# Altium PCB 16CH_PWM_POWER_00.PcbDoc
Units mm, origin at the board's own origin, x right, y up, seen from the top; angles counter-clockwise.
Board outline 100 x 60 mm, 2 copper layers (Top Layer, Bottom Layer), stack 0.971 mm thick; 79 components, 61 nets, 212 pads, 370 vias.
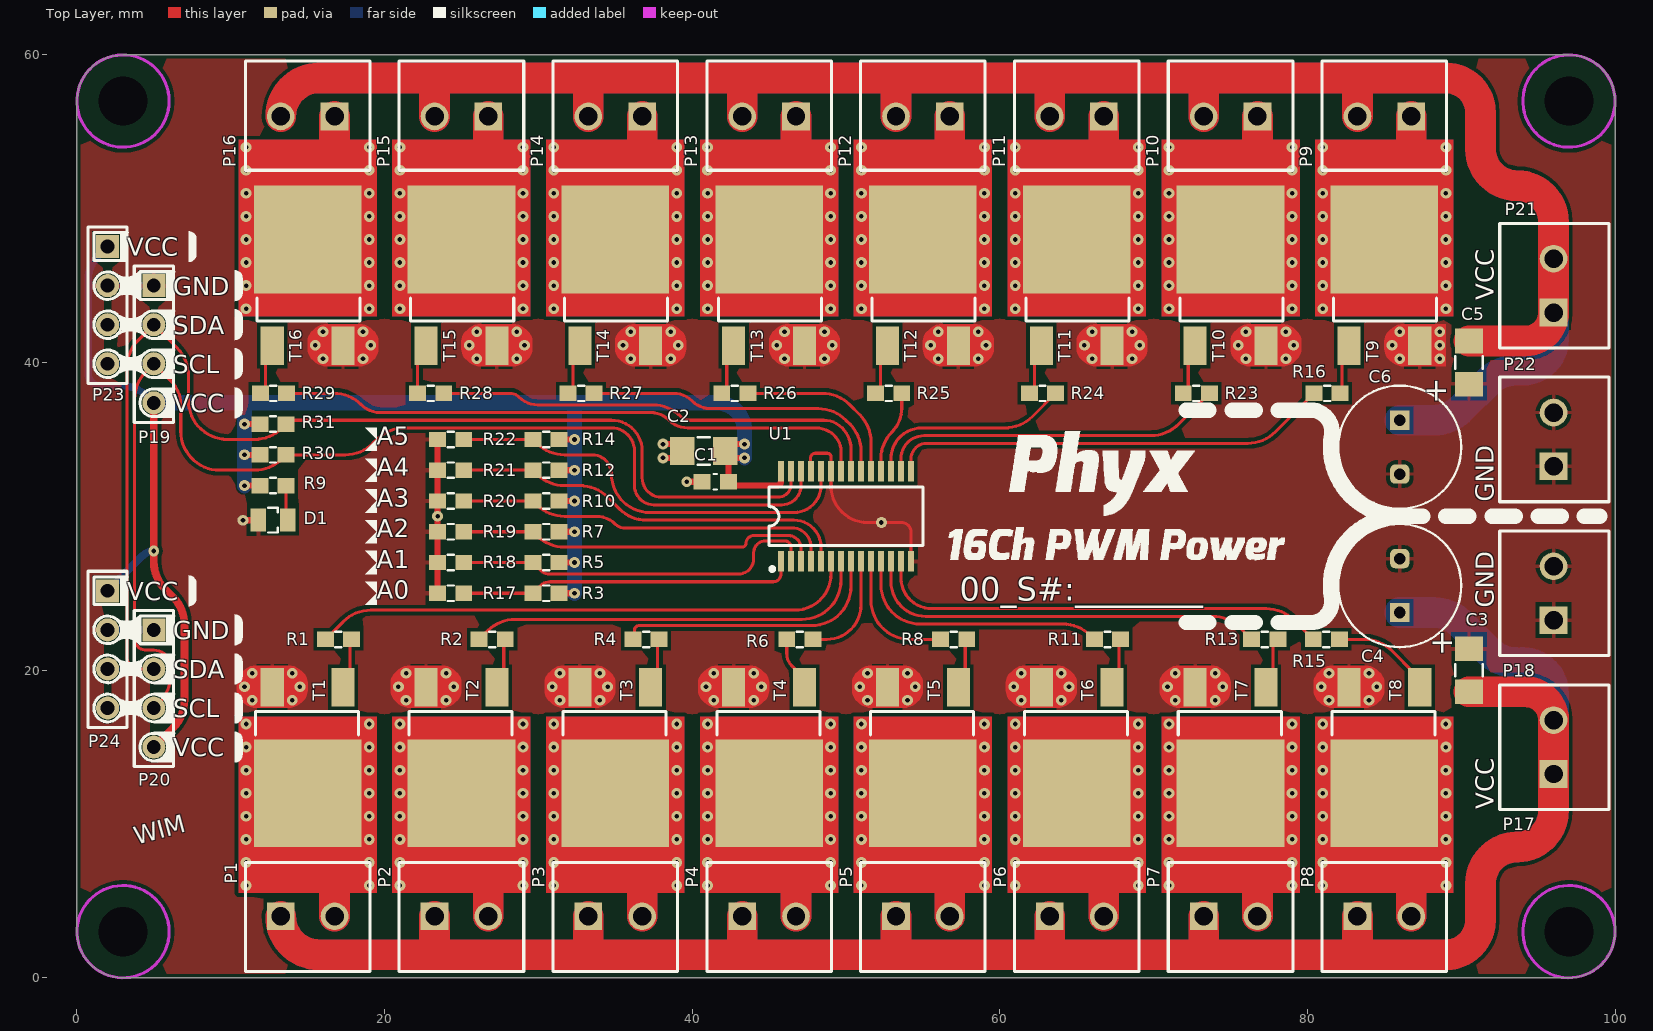
[diagram p0: Top Layer view]
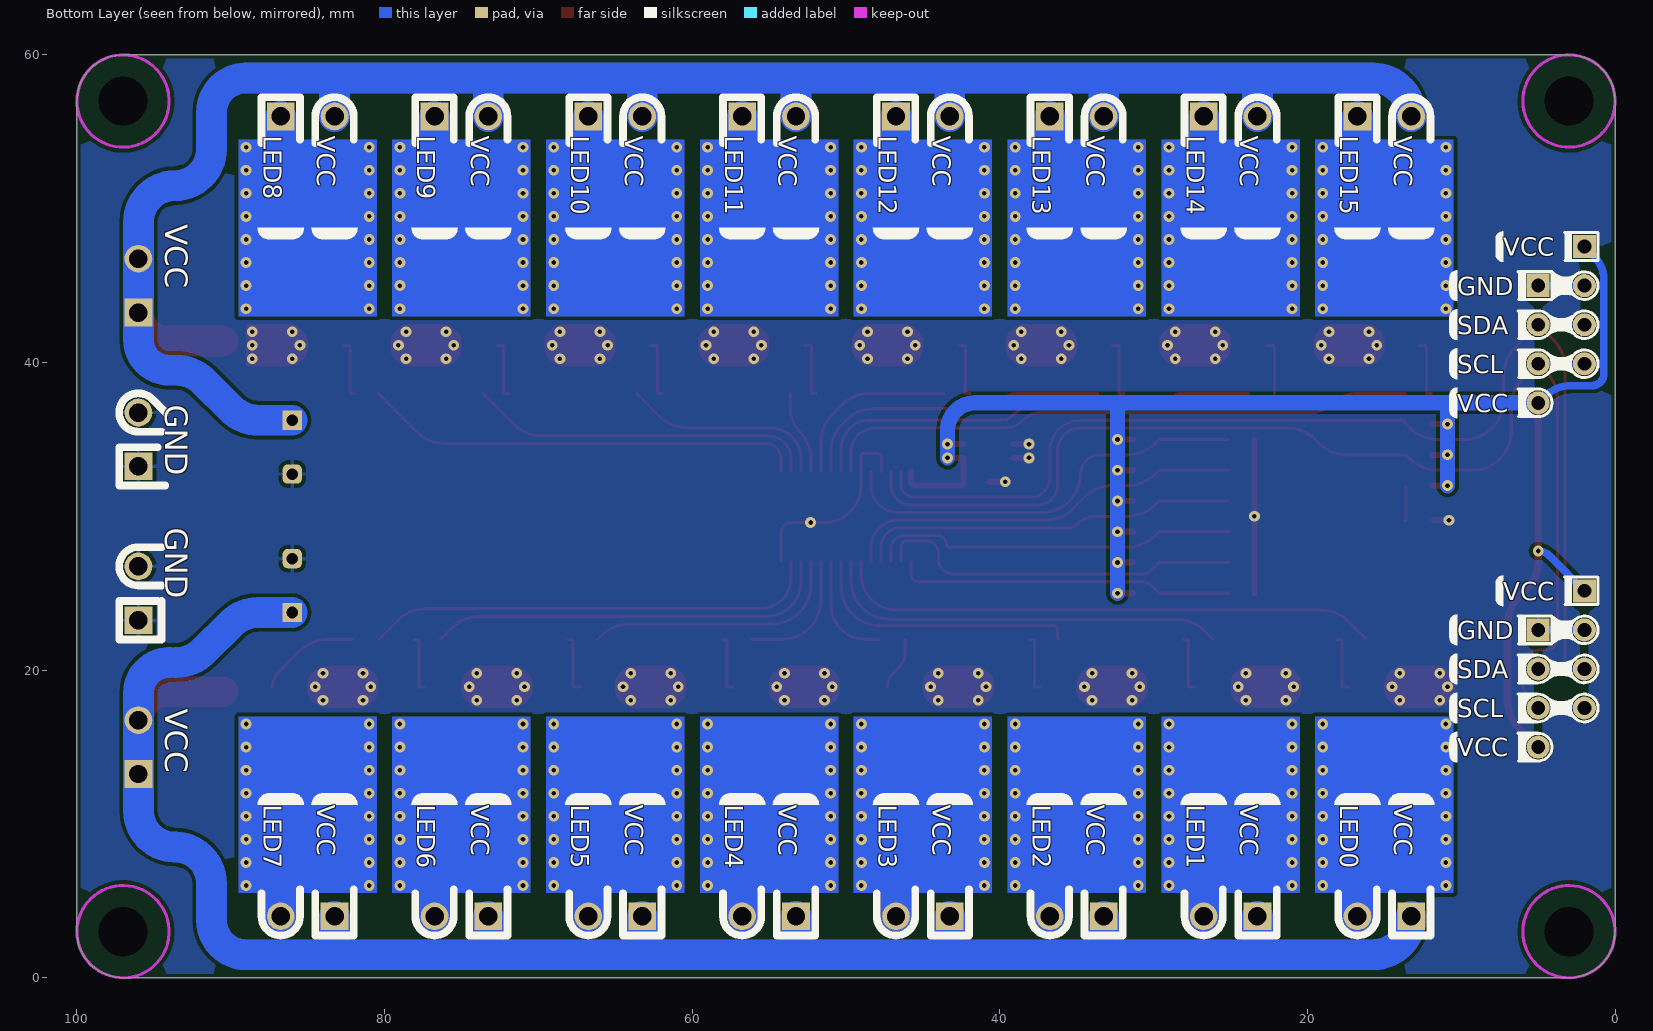
[diagram p1: Bottom Layer view, seen from below]
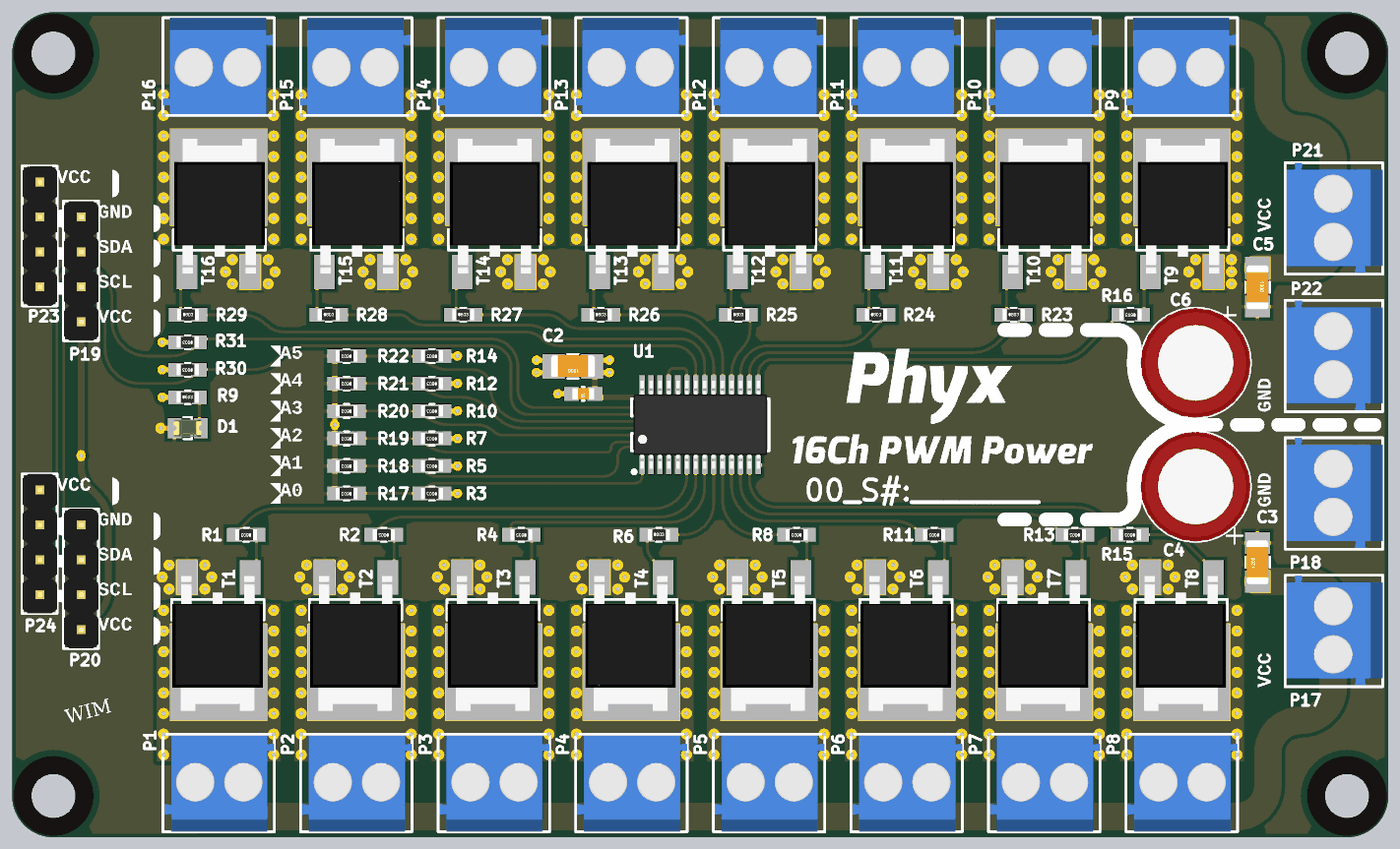
[diagram p2: 3D render of the assembled board from above, using the file's embedded part models]

## Layer stack, top to bottom
Top Solder: solder mask 0.0102, Solder Resist, Dk 3.5
Top Layer: signal copper 0.0356
Dielectric1: dielectric 0.9, FR-4, Dk 4.8
Bottom Layer: signal copper 0.0356
Bottom Solder: solder mask 0.0102, Solder Resist, Dk 3.5

## Board outline
0,3 0,57 cw(c3,57) 3,60 97,60 cw(c97,57) 100,57 100,3 cw(c97,3) 97,0 3,0 cw(c3,3)

## Design rules (kind name [scope] priority, off if disabled: settings)
BoardOutlineClearance [All] p1: gap=0.25 ignorepadtopadclearanceinfootprint=FALSE
Clearance [All] p1: gap=0.15 ignorepadtopadclearanceinfootprint=FALSE except(0: Arc-Hole Track-Hole SMDPad-Hole THPad-Hole Via-Hole Fill-Hole Poly-Hole Region-Hole Text-Hole; 0.25: Arc-Poly Track-Poly SMDPad-Poly THPad-Poly Via-Poly Fill-Poly Poly-Poly)
HoleSize [All] p1: absolutevalues=TRUE maxlimit=4 minlimit=0.025 maxpercent=80.000 minpercent=20.000
MinimumSolderMaskSliver [All] p1: minsoldermaskwidth=0.1
PolygonConnect PolygonConnect_Via [IsVia] p1: connectstyle=Direct reliefconductorwidth=0.254 reliefentries=4 polygonreliefangle="90 Angle" airgapwidth=0.254
PolygonConnect PolygonConnect_TIO [All vs OnLayer('Top Layer')] p2: connectstyle=Relief reliefconductorwidth=0.25 reliefentries=4 polygonreliefangle="90 Angle" airgapwidth=0.25
PolygonConnect [All] p3: connectstyle=Relief reliefconductorwidth=0.25 reliefentries=4 polygonreliefangle="90 Angle" airgapwidth=0.25
RoutingVias [All] p1: holewidth=0.3 width=0.7 viastyle="Through Hole" minholewidth=0.3 minwidth=0.7 maxholewidth=0.3 maxwidth=0.7
SilkToSolderMaskClearance SilkscreenOverComponentPads [IsPad] p1: minsilkscreentomaskgap=0.254 clearancetoexposedcopper=TRUE
SolderMaskExpansion SolderMaskExpansion_VIA [IsVia] p1: expansion=-0.1 useseparateexpansions=TRUE expansionbottom=-10
SolderMaskExpansion [All] p2: expansion=0.05
Width [All] p1: maxlimit=2 minlimit=0.15 preferedwidth=0.5 minimp=50.000000 maximp=50.000000 favimp=50.000000
27 further rules are at their usual default settings.

## Classes and differential pairs
net class POWER: GND VCC VPWR1 VPWR2

## Components (designator, comment, footprint, x,y, rotation, side; value= is the part's Value field where it differs from the comment)
C1 "CAP_CERAMIC" C0603_N 41.5,32.25 r180 top value="100nF 16V"
C2 "CAP_CERAMIC" C1206_N 40.75,34.25 r180 top value="10uF 25V"
C3 "CAP_CERAMIC" C1206_N 90.5,20 r90 top value="10uF 25V"
C4 "CAP_POL" C_8x11.5_3.5mm 86,25.5 r90 top value="100uF 25V"
C5 "CAP_CERAMIC" C1206_N 90.5,40 r270 top value="10uF 25V"
C6 "CAP_POL" C_8x11.5_3.5mm 86,34.5 r270 top value="100uF 25V"
D1 "Green LED" LED_0805_GR 12.75,29.75 r180 top
P1 "2 Way Screw HDR 3,5mm" WE_691103110002 15,4 r0 top value=691103110002
P2 "2 Way Screw HDR 3,5mm" WE_691103110002 25,4 r0 top value=691103110002
P3 "2 Way Screw HDR 3,5mm" WE_691103110002 35,4 r0 top value=691103110002
P4 "2 Way Screw HDR 3,5mm" WE_691103110002 45,4 r0 top value=691103110002
P5 "2 Way Screw HDR 3,5mm" WE_691103110002 55,4 r0 top value=691103110002
P6 "2 Way Screw HDR 3,5mm" WE_691103110002 65,4 r0 top value=691103110002
P7 "2 Way Screw HDR 3,5mm" WE_691103110002 75,4 r0 top value=691103110002
P8 "2 Way Screw HDR 3,5mm" WE_691103110002 85,4 r0 top value=691103110002
P9 "2 Way Screw HDR 3,5mm" WE_691103110002 85,56 r180 top value=691103110002
P10 "2 Way Screw HDR 3,5mm" WE_691103110002 75,56 r180 top value=691103110002
P11 "2 Way Screw HDR 3,5mm" WE_691103110002 65,56 r180 top value=691103110002
P12 "2 Way Screw HDR 3,5mm" WE_691103110002 55,56 r180 top value=691103110002
P13 "2 Way Screw HDR 3,5mm" WE_691103110002 45,56 r180 top value=691103110002
P14 "2 Way Screw HDR 3,5mm" WE_691103110002 35,56 r180 top value=691103110002
P15 "2 Way Screw HDR 3,5mm" WE_691103110002 25,56 r180 top value=691103110002
P16 "2 Way Screw HDR 3,5mm" WE_691103110002 15,56 r180 top value=691103110002
P17 "2 Way Screw HDR 3,5mm" WE_691103110002 96,15 r90 top value=691103110002
P18 "2 Way Screw HDR 3,5mm" WE_691103110002 96,25 r90 top value=691103110002
P19 "Header 4" HDR1X4 5,45 r270 top
P20 "Header 4" HDR1X4 5,22.62 r270 top
P21 "2 Way Screw HDR 3,5mm" WE_691103110002 96,45 r90 top value=691103110002
P22 "2 Way Screw HDR 3,5mm" WE_691103110002 96,35 r90 top value=691103110002
P23 "Header 4" HDR1X4 2,47.54 r270 top
P24 "Header 4" HDR1X4 2,25.16 r270 top
R1 "RESISTOR" R0603_N 17,22 r180 top value=1K
R2 "RESISTOR" R0603_N 27,22 r180 top value=1K
R3 "RESISTOR" R0603_N 30.5,25 r180 top value=0R
R4 "RESISTOR" R0603_N 37,22 r180 top value=1K
R5 "RESISTOR" R0603_N 30.5,27 r180 top value=0R
R6 "RESISTOR" R0603_N 47,22 r0 top value=1K
R7 "RESISTOR" R0603_N 30.5,29 r180 top value=0R
R8 "RESISTOR" R0603_N 57,22 r180 top value=1K
R9 "RESISTOR" R0603_N 12.75,32 r0 top value=330R
R10 "RESISTOR" R0603_N 30.5,31 r180 top value=0R
R11 "RESISTOR" R0603_N 67,22 r180 top value=1K
R12 "RESISTOR" R0603_N 30.5,33 r180 top value=0R
R13 "RESISTOR" R0603_N 77.225,22 r180 top value=1K
R14 "RESISTOR" R0603_N 30.5,35 r180 top value=0R
R15 "RESISTOR" R0603_N 81.225,22 r180 top value=1K
R16 "RESISTOR" R0603_N 81.275,38 r180 top value=1K
R17 "RESISTOR" R0603_N 24.3,25 r180 top value=10K
R18 "RESISTOR" R0603_N 24.3,27 r180 top value=10K
R19 "RESISTOR" R0603_N 24.3,29 r180 top value=10K
R20 "RESISTOR" R0603_N 24.3,31 r180 top value=10K
R21 "RESISTOR" R0603_N 24.3,33 r180 top value=10K
R22 "RESISTOR" R0603_N 24.3,35 r180 top value=10K
R23 "RESISTOR" R0603_N 72.775,38 r0 top value=1K
R24 "RESISTOR" R0603_N 62.775,38 r0 top value=1K
R25 "RESISTOR" R0603_N 52.775,38 r0 top value=1K
R26 "RESISTOR" R0603_N 42.775,38 r0 top value=1K
R27 "RESISTOR" R0603_N 32.775,38 r0 top value=1K
R28 "RESISTOR" R0603_N 23,38 r0 top value=1K
R29 "RESISTOR" R0603_N 12.775,38 r0 top value=1K
R30 "RESISTOR" R0603_N 12.75,34 r180 top value=1K
R31 "RESISTOR" R0603_N 12.75,36 r180 top value=1K
T1 "70A 30V N-Ch MOSFET Vgs 2.5" TO-252 15,12 r180 top value=AOD210
T2 "70A 30V N-Ch MOSFET Vgs 2.5" TO-252 25,12 r180 top value=AOD210
T3 "70A 30V N-Ch MOSFET Vgs 2.5" TO-252 35,12 r180 top value=AOD210
T4 "70A 30V N-Ch MOSFET Vgs 2.5" TO-252 45,12 r180 top value=AOD210
T5 "70A 30V N-Ch MOSFET Vgs 2.5" TO-252 55,12 r180 top value=AOD210
T6 "70A 30V N-Ch MOSFET Vgs 2.5" TO-252 65,12 r180 top value=AOD210
T7 "70A 30V N-Ch MOSFET Vgs 2.5" TO-252 75,12 r180 top value=AOD210
T8 "70A 30V N-Ch MOSFET Vgs 2.5" TO-252 85,12 r180 top value=AOD210
T9 "70A 30V N-Ch MOSFET Vgs 2.5" TO-252 85,48 r0 top value=AOD210
T10 "70A 30V N-Ch MOSFET Vgs 2.5" TO-252 75,48 r0 top value=AOD210
T11 "70A 30V N-Ch MOSFET Vgs 2.5" TO-252 65,48 r0 top value=AOD210
T12 "70A 30V N-Ch MOSFET Vgs 2.5" TO-252 55,48 r0 top value=AOD210
T13 "70A 30V N-Ch MOSFET Vgs 2.5" TO-252 45,48 r0 top value=AOD210
T14 "70A 30V N-Ch MOSFET Vgs 2.5" TO-252 35,48 r0 top value=AOD210
T15 "70A 30V N-Ch MOSFET Vgs 2.5" TO-252 25,48 r0 top value=AOD210
T16 "70A 30V N-Ch MOSFET Vgs 2.5" TO-252 15,48 r0 top value=AOD210
U1 "I2C 12-bit 16Ch PWM" NXP_SOT361-1 50,30 r0 top value=PCA9685PW

## Footprints (in the part's own frame and the unit in brackets; to place one, negate y for a bottom-side part, rotate by r counter-clockwise, add the part's x,y. Pads: shape width x height; smd on the part's side, far side on the other; paste and mask are expansions set on the pad)
C0603_N [mm] "Low density"
  rect 1.1x1 smd: 1(-0.85,0) 2(0.85,0)
  silkscreen extent -0.1,-0.5 0.1,0.5, body extent -0.8,-0.4 0.8,0.4, height 0.3
C1206_N [mm] "low density"
  rect 1.6x1.8 smd: 1(-1.4,0) 2(1.4,0)
  silkscreen extent -0.4,-0.89 0.4,0.89, body extent -1.6,-0.8 1.6,0.8, height 1
C_8x11.5_3.5mm [mm] "Capacitor, Electrolytic, Radial; Body 8 x 11.5mm; 3.5mm pitch"
  rect 1.25x1.25 hole 0.75: 1(-1.75,0)
  rrect50% 1.25x1.25 hole 0.75: 2(1.75,0)
  silkscreen extent -4,-4 4,4, body extent -4,-4 4,4, height 12
HDR1X4 [mm] "Connector; Header; 4 Position"
  rect 1.5x1.5 hole 0.9: 1(0,0)
  round 1.5 hole 0.9: 2(2.54,0) 3(5.08,0) 4(7.62,0)
  silkscreen extent -1.27,-1.27 8.89,1.27, body extent -1.27,-1.23 8.89,1.27, height 8.2
LED_0805_GR [mm] "0805 LED GREEN"
  rect 1x1.5 smd: 1(-0.95,0) 2(0.95,0)
  silkscreen extent -0.3,-0.8 0.3,0.8, body extent -1.01,-0.62 1.01,0.63, height 1.1
NXP_SOT361-1 [mm] "TSSOP; 28 Leads; Body Width 4.1 mm; Pitch 0.65 mm"
  rect 0.4x1.35 smd: 1(-4.225,-2.925) 2(-3.575,-2.925) 3(-2.925,-2.925) 4(-2.275,-2.925) 5(-1.625,-2.925) 6(-0.975,-2.925) 7(-0.325,-2.925) 8(0.325,-2.925) 9(0.975,-2.925) 10(1.625,-2.925) 11(2.275,-2.925) 12(2.925,-2.925) 13(3.575,-2.925) 14(4.225,-2.925) 15(4.225,2.925) 16(3.575,2.925) 17(2.925,2.925) 18(2.275,2.925) 19(1.625,2.925) 20(0.975,2.925) 21(0.325,2.925) 22(-0.325,2.925) 23(-0.975,2.925) 24(-1.625,2.925) 25(-2.275,2.925) 26(-2.925,2.925) 27(-3.575,2.925) 28(-4.225,2.925)
  silkscreen extent -5,-3.55 5,1.9, body extent -4.85,-3.2 4.85,3.2, height 1.2
R0603_N [mm] "Low density"
  rect 1.1x1 smd: 1(-0.85,0) 2(0.85,0)
  silkscreen extent -0.2,-0.5 0.2,0.5, body extent -0.8,-0.41 0.8,0.41, height 0.45
TO-252 [mm] "TO-252"
  rect 1.5x2.5 smd: 1(-2.3,-6.9) 2(2.3,-6.9)
  rect 7x7 smd: 3(0,0)
  silkscreen extent -3.3,-5.3 3.4,-3.8, body extent -3.21,-7 3.37,2.81, height 2.3
WE_691103110002 [mm]
  rect 1.8x1.8 hole 1.2: 1(-1.75,0)
  round 1.8 hole 1.2: 2(1.75,0)
  silkscreen extent -4.05,-3.6 4.05,3.5, body extent -3.95,-3.6 4.05,3.4, height 8.41

## Part data
C1: library part "CAP # 100nF 16V 0603", "Capacitor Ceramic"
C2 C3 C5: library part "CAP # 10uF 25V 1206", "Capacitor Ceramic", Supplier Part Number 1=2320887, Supplier 1=Farnell
C4 C6: library part "CAP 100uF 25V 8x11mm", "Capacitor electrolyt", Supplier Part Number 1=1902007, Supplier 1=Farnell
D1: library part "LED # Green 0805", "=Description", Supplier Part Number 1=2099239, Supplier 1=Farnell
P1 P2 P3 P4 P5 P6 P7 P8 P9 P10 P11 P12 P13 P14 P15 P16 P17 P18 P21 P22: library part "Terminal Block 3,5mm 2way - 691103110002", Supplier 1=Wurth
P19 P20 P23 P24: library part "Pin Header 2.54mm 4way"
R1 R2 R4 R6 R8 R11 R13 R15 R16 R23 R24 R25 R26 R27 R28 R29 R30 R31: library part "RES # 1K 0603"
R3 R5 R7 R10 R12 R14: library part "RES # 0R 0603", Supplier Part Number 1=2447743, Supplier 1=Farnell
R9: library part "RES # 330R 0603"
R17 R18 R19 R20 R21 R22: library part "RES # 10K 0603", Supplier Part Number 1=2502397, Supplier 1=Farnell
T1 T2 T3 T4 T5 T6 T7 T8 T9 T10 T11 T12 T13 T14 T15 T16: library part "AOD210 N-Ch MOSFET 70A", Supplier 1=AliExpress
U1: library part "PWM # PCA9685PW", "=Description", Supplier Part Number 1=1854074, Supplier 1=Farnell

## Free pads (board coordinates)
  round 2.6 hole 3.2 unplated mask+1.6: 0(3,3) 0(3,57) 0(97,3) 0(97,57)

## Via types
v1: diameter 0.7, hole 0.3, Top Layer to Bottom Layer, 370 vias

## Nets (pads, with @x,y where several pads share a name; then routed paths per layer and width w, separated by ;. In a path a pad name is that pad's centre, name@x,y a point inside that pad or via, vN(x,y) a via of type N, cw(c..) or ccw(c..) an arc to the next point about the centre after c; other vN are vias at no path point)
A0: R3.2 R17.1 U1.1 | length 22
  Top Layer w0.2: R17.1 R3.2 30.153,25.503 cw(c30.75,24.905) 30.75,25.75 45.275,25.75 ccw(c45.275,26.25) 45.493,25.8 ccw(c45.275,26.25) 45.775,26.25 U1.1
A1: R5.2 R18.1 U1.2 | length 24.1
  Top Layer w0.2: R18.1 R5.2 30.19,26.46 ccw(c30.696,26.966) 30.696,26.25 32.003,26.25 43,26.25 ccw(c43,27.25) 44,27.25 44,27.65 cw(c44.75,27.65) 44.75,28.4 46.025,28.4 cw(c46.025,28) 46.425,28 U1.2
A2: R7.2 R19.1 U1.3 | length 24
  Top Layer w0.2: R19.1 R7.2 29.906,28.744 ccw(c31.702,30.54) 31.702,28 43.25,28 ccw(c43.25,28.25) 43.5,28.25 cw(c44,28.25) 44,28.75 46.25,28.75 cw(c46.25,27.925) 47.075,27.925 U1.3
A3: R10.2 R20.1 U1.4 | length 24.7
  Top Layer w0.2: R20.1 R10.2 29.906,30.744 ccw(c31.702,32.54) 31.702,30 33.793,30 cw(c33.793,28.293) 35,29.5 ccw(c35.604,30.104) 35.5,29.256 ccw(c35.604,30.104) 35.604,29.25 46.475,29.25 cw(c46.475,28) 47.725,28 U1.4
A4: R12.2 R21.1 U1.5 | length 26.2
  Top Layer w0.2: R21.1 R12.2 29.906,32.744 ccw(c31.702,34.54) 31.702,32 32.698,32 cw(c32.698,29.46) 34.494,31.256 35.256,30.494 ccw(c37.052,32.29) 36.5,29.811 ccw(c37.052,32.29) 37.052,29.75 46.625,29.75 cw(c46.625,28) 48.375,28 U1.5
A5: R14.2 R22.1 U1.24 | length 27.6
  Top Layer w0.2: R22.1 R14.2 29.906,34.744 ccw(c31.702,36.54) 31.702,34 33.5,34 cw(c33.5,32.75) 34.75,32.75 ccw(c37.25,32.75) 35.25,31.25 ccw(c37.25,32.75) 35.75,30.75 ccw(c37.25,32.75) 37.25,30.25 46.625,30.25 ccw(c46.625,32) 48.375,32 U1.24
GND: C1.2 C2.2 C3.2 C4.2 C5.2 C6.2 D1.2 P18.1 P18.2 P19.1 P20.1 P22.1 P22.2 P23.2 P24.2 R17.2 R18.2 R19.2 R20.2 R21.2 R22.2 T1.2 T2.2 T3.2 T4.2 T5.2 T6.2 T7.2 T8.2 T9.2 T10.2 T11.2 T12.2 T13.2 T14.2 T15.2 T16.2 U1.14 U1.23 U1.25 | length 33.5
  Top Layer w0.2: U1.25 cw(c47.725,32.95) 47.7,32.95 47.7,33.8 cw(c48,33.8) 48,34.1 48.8,34.1 cw(c48.8,33.875) 49.025,33.875 U1.23 49.025,31.975 ccw(c51.4,31.975) 51.4,29.6 53.6,29.6 cw(c53.6,28.975) 54.225,28.975 U1.14
  Top Layer w0.4: v1(10.8,29.75) D1.2 ; R17.2 R18.2 R19.2 R20.2 R21.2 R22.2 ; v1(38.1,33.8) C2.2@39.1,33.8 ; v1(38.1,34.7) C2.2@39.1,34.7 ; v1(39.65,32.25) C1.2
  Bottom Layer w0.5: P24.2 4.96,22.62 cw(c4.96,22.21) P20.1@5.25,22.5 ; P23.2 P19.1
  other v1: 11.4,18.05 14,18.05 21.4,18.05 24,18.05 31.4,18.05 34,18.05 41.4,18.05 44,18.05 51.4,18.05 54,18.05 61.4,18.05 64,18.05 71.4,18.05 74,18.05 81.4,18.05 84,18.05 10.9,18.925 14.5,18.925 20.9,18.925 24.5,18.925 30.9,18.925 34.5,18.925 40.9,18.925 44.5,18.925 50.9,18.925 54.5,18.925 60.9,18.925 64.5,18.925 70.9,18.925 74.5,18.925 80.9,18.925 84.5,18.925 11.4,19.8 14,19.8 21.4,19.8 24,19.8 31.4,19.8 34,19.8 41.4,19.8 44,19.8 51.4,19.8 54,19.8 61.4,19.8 64,19.8 71.4,19.8 74,19.8 81.4,19.8 84,19.8 52.3,29.6 23.45,30 16,40.25 18.6,40.25 26,40.25 28.6,40.25 36,40.25 38.6,40.25 46,40.25 48.6,40.25 56,40.25 58.6,40.25 66,40.25 68.6,40.25 76,40.25 78.6,40.25 86,40.25 88.6,40.25 15.5,41.125 19.1,41.125 25.5,41.125 29.1,41.125 35.5,41.125 39.1,41.125 45.5,41.125 49.1,41.125 55.5,41.125 59.1,41.125 65.5,41.125 69.1,41.125 75.5,41.125 79.1,41.125 85.5,41.125 88.6,41.125 16,42 18.6,42 26,42 28.6,42 36,42 38.6,42 46,42 48.6,42 56,42 58.6,42 66,42 68.6,42 76,42 78.6,42 86,42 88.6,42
NetD1_1: D1.1 R9.2 | length 2.4
  Top Layer w0.2: R9.2 13.6,29.75 D1.1
NetP1_2: P1.2 T1.3 | length 16
  Top Layer w2: P1.2 T1.3@16.75,12
  Bottom Layer w2: P1.2 16.75,12
  other v1: 11,6 19,6 11,7.5 19,7.5 11,9 19,9 11,10.5 19,10.5 11,12 19,12 11,13.5 19,13.5 11,15 19,15 11,16.5 19,16.5
NetP2_2: P2.2 T2.3 | length 16
  Top Layer w2: P2.2 T2.3@26.75,12
  Bottom Layer w2: P2.2 26.75,12
  other v1: 21,6 29,6 21,7.5 29,7.5 21,9 29,9 21,10.5 29,10.5 21,12 29,12 21,13.5 29,13.5 21,15 29,15 21,16.5 29,16.5
NetP3_2: P3.2 T3.3 | length 16
  Top Layer w2: P3.2 T3.3@36.75,12
  Bottom Layer w2: P3.2 36.75,12
  other v1: 31,6 39,6 31,7.5 39,7.5 31,9 39,9 31,10.5 39,10.5 31,12 39,12 31,13.5 39,13.5 31,15 39,15 31,16.5 39,16.5
NetP4_2: P4.2 T4.3 | length 16
  Top Layer w2: P4.2 T4.3@46.75,12
  Bottom Layer w2: P4.2 46.75,12
  other v1: 41,6 49,6 41,7.5 49,7.5 41,9 49,9 41,10.5 49,10.5 41,12 49,12 41,13.5 49,13.5 41,15 49,15 41,16.5 49,16.5
NetP5_2: P5.2 T5.3 | length 16
  Top Layer w2: P5.2 T5.3@56.75,12
  Bottom Layer w2: P5.2 56.75,12
  other v1: 51,6 59,6 51,7.5 59,7.5 51,9 59,9 51,10.5 59,10.5 51,12 59,12 51,13.5 59,13.5 51,15 59,15 51,16.5 59,16.5
NetP6_2: P6.2 T6.3 | length 16
  Top Layer w2: P6.2 T6.3@66.75,12
  Bottom Layer w2: P6.2 66.75,12
  other v1: 61,6 69,6 61,7.5 69,7.5 61,9 69,9 61,10.5 69,10.5 61,12 69,12 61,13.5 69,13.5 61,15 69,15 61,16.5 69,16.5
NetP7_2: P7.2 T7.3 | length 16
  Top Layer w2: P7.2 T7.3@76.75,12
  Bottom Layer w2: P7.2 76.75,12
  other v1: 71,6 79,6 71,7.5 79,7.5 71,9 79,9 71,10.5 79,10.5 71,12 79,12 71,13.5 79,13.5 71,15 79,15 71,16.5 79,16.5
NetP8_2: P8.2 T8.3 | length 16
  Top Layer w2: P8.2 T8.3@86.75,12
  Bottom Layer w2: P8.2 86.75,12
  other v1: 81,6 89,6 81,7.5 89,7.5 81,9 89,9 81,10.5 89,10.5 81,12 89,12 81,13.5 89,13.5 81,15 89,15 81,16.5 89,16.5
NetP9_1: P9.1 T9.3 | length 16
  Top Layer w2: T9.3@86.75,48 P9.1
  Bottom Layer w2: 86.75,48 P9.1
  other v1: 81,43.5 89,43.5 81,45 89,45 81,46.5 89,46.5 81,48 89,48 81,49.5 89,49.5 81,51 89,51 81,52.5 89,52.5 81,54 89,54
NetP10_1: P10.1 T10.3 | length 16
  Top Layer w2: T10.3@76.75,48 P10.1
  Bottom Layer w2: 76.75,48 P10.1
  other v1: 71,43.5 79,43.5 71,45 79,45 71,46.5 79,46.5 71,48 79,48 71,49.5 79,49.5 71,51 79,51 71,52.5 79,52.5 71,54 79,54
NetP11_1: P11.1 T11.3 | length 16
  Top Layer w2: T11.3@66.75,48 P11.1
  Bottom Layer w2: 66.75,48 P11.1
  other v1: 61,43.5 69,43.5 61,45 69,45 61,46.5 69,46.5 61,48 69,48 61,49.5 69,49.5 61,51 69,51 61,52.5 69,52.5 61,54 69,54
NetP12_1: P12.1 T12.3 | length 16
  Top Layer w2: T12.3@56.75,48 P12.1
  Bottom Layer w2: 56.75,48 P12.1
  other v1: 51,43.5 59,43.5 51,45 59,45 51,46.5 59,46.5 51,48 59,48 51,49.5 59,49.5 51,51 59,51 51,52.5 59,52.5 51,54 59,54
NetP13_1: P13.1 T13.3 | length 16
  Top Layer w2: T13.3@46.75,48 P13.1
  Bottom Layer w2: 46.75,48 P13.1
  other v1: 41,43.5 49,43.5 41,45 49,45 41,46.5 49,46.5 41,48 49,48 41,49.5 49,49.5 41,51 49,51 41,52.5 49,52.5 41,54 49,54
NetP14_1: P14.1 T14.3 | length 16
  Top Layer w2: T14.3@36.75,48 P14.1
  Bottom Layer w2: 36.75,48 P14.1
  other v1: 31,43.5 39,43.5 31,45 39,45 31,46.5 39,46.5 31,48 39,48 31,49.5 39,49.5 31,51 39,51 31,52.5 39,52.5 31,54 39,54
NetP15_1: P15.1 T15.3 | length 16
  Top Layer w2: T15.3@26.75,48 P15.1
  Bottom Layer w2: 26.75,48 P15.1
  other v1: 21,43.5 29,43.5 21,45 29,45 21,46.5 29,46.5 21,48 29,48 21,49.5 29,49.5 21,51 29,51 21,52.5 29,52.5 21,54 29,54
NetP16_1: P16.1 T16.3 | length 16
  Top Layer w2: T16.3@16.75,48 P16.1
  Bottom Layer w2: 16.75,48 P16.1
  other v1: 11,43.5 19,43.5 11,45 19,45 11,46.5 19,46.5 11,48 19,48 11,49.5 19,49.5 11,51 19,51 11,52.5 19,52.5 11,54 19,54
NetR1_2: R1.2 U1.6 | length 35.7
  Top Layer w0.2: R1.2 17.306,23.156 cw(c19.102,21.36) 19.102,23.9 46.675,23.9 ccw(c46.675,26.25) 49.025,26.25 U1.6
NetR2_2: R2.2 U1.7 | length 26.6
  Top Layer w0.2: R2.2 26.708,22.558 cw(c28.5,20.765) 28.5,23.3 47.135,23.3 ccw(c47.135,25.84) 49.675,25.84 U1.7
NetR4_2: R4.2 U1.8 | length 18
  Top Layer w0.2: R4.2 ccw(c36.15,22.1) 36.25,22.1 36.25,22.6 cw(c36.55,22.6) 36.55,22.9 47.785,22.9 ccw(c47.785,25.44) 50.325,25.44 U1.8
NetR6_2: R6.2 U1.9 | length 7.2
  Top Layer w0.2: R6.2 48.75,22 ccw(c48.75,24.225) 50.975,24.225 U1.9
NetR8_2: R8.2 U1.10 | length 8.5
  Top Layer w0.2: U1.10 51.625,24.54 ccw(c54.165,24.54) 54.165,22 R8.2
NetR11_2: R11.2 U1.11 | length 17.2
  Top Layer w0.2: U1.11 52.275,25.54 ccw(c54.815,25.54) 54.815,23 64.098,23 cw(c64.098,20.46) 65.894,22.256 R11.2
NetR13_2: R13.2 U1.12 | length 26.6
  Top Layer w0.2: U1.12 52.925,25.75 ccw(c55.175,25.75) 55.175,23.5 73.823,23.5 cw(c73.823,20.96) 75.619,22.756 R13.2
NetR15_2: R15.2 U1.13 | length 29.7
  Top Layer w0.2: U1.13 53.575,26 ccw(c55.575,26) 55.575,24 77.323,24 cw(c77.323,21.46) 79.119,23.256 R15.2
NetR16_2: R16.2 U1.15 | length 28.8
  Top Layer w0.2: U1.15 54.225,33.725 cw(c55.25,33.725) 55.25,34.75 76.123,34.75 ccw(c76.123,37.29) 77.919,35.494 R16.2
NetR23_2: R23.2 U1.16 | length 22.8
  Top Layer w0.2: U1.16 53.575,33.75 cw(c55.075,33.75) 55.075,35.25 69.823,35.25 ccw(c69.823,37.79) 71.619,35.994 R23.2
NetR24_2: R24.2 U1.17 | length 13.5
  Top Layer w0.2: U1.17 52.925,33.75 cw(c54.925,33.75) 54.925,35.75 60.323,35.75 ccw(c60.323,38.29) 62.119,36.494 R24.2
NetR25_2: R25.2 U1.18 | length 5.4
  Top Layer w0.2: U1.18 52.275,33.75 cw(c54.749,33.75) 52.999,35.499 ccw(c51.489,37.01) 53.485,36.25 ccw(c51.489,37.01) 53.625,37.01 R25.2
NetR26_2: R26.2 U1.19 | length 11.6
  Top Layer w0.2: R26.2 48.448,38 cw(c48.448,35.46) 50.244,37.256 50.881,36.619 cw(c49.085,34.823) 51.625,34.823 U1.19
NetR27_2: R27.2 U1.20 | length 20.5
  Top Layer w0.2: R27.2 38.793,38 cw(c38.793,36.293) 40,37.5 ccw(c41.207,38.707) 40.75,37.062 ccw(c41.207,38.707) 41.207,37 48.198,37 cw(c48.198,34.46) 49.994,36.256 50.231,36.019 cw(c48.435,34.223) 50.975,34.223 U1.20
NetR28_2: R28.2 U1.21 | length 29.5
  Top Layer w0.2: R28.2 28.146,38 cw(c28.146,37.146) 28.75,37.75 ccw(c29.957,38.957) 29.957,37.25 37.448,37.25 cw(c37.448,34.71) 39.244,36.506 ccw(c39.862,37.124) 39.862,36.25 48.551,36.25 cw(c48.551,34.564) 49.744,35.756 cw(c48.342,34.354) 50.325,34.354 U1.21
NetR29_2: R29.2 U1.22 | length 38.8
  Top Layer w0.2: R29.2 16.698,38 cw(c16.698,35.46) 18.494,37.256 18.5,37.25 ccw(c19.707,38.457) 19.707,36.75 37.293,36.75 cw(c37.293,35.043) 38.5,36.25 ccw(c39.707,37.457) 39.707,35.75 48.051,35.75 cw(c48.051,34.064) 49.244,35.256 49.25,35.25 cw(c48.225,34.225) 49.675,34.225 U1.22
PWM1: R1.1 T1.1 | length 3.9
  Top Layer w0.2: T1.1 17.75,18.9 17.75,22 R1.1@18.075,22
PWM2: R2.1 T2.1 | length 3.9
  Top Layer w0.2: T2.1 27.75,18.9 27.75,22 R2.1@28.075,22
PWM3: R4.1 T3.1 | length 3.9
  Top Layer w0.2: T3.1 37.75,18.9 37.75,22 R4.1@38.075,22
PWM4: R6.1 T4.1 | length 3.5
  Top Layer w0.2: R6.1 46.15,21.095 ccw(c47.345,21.095) 46.5,20.25 46.911,19.839 cw(c45.972,18.9) T4.1
PWM5: R8.1 T5.1 | length 3.9
  Top Layer w0.2: T5.1 57.75,18.9 57.75,22 R8.1@58.075,22
PWM6: R11.1 T6.1 | length 3.9
  Top Layer w0.2: T6.1 67.75,18.9 67.75,22 R11.1@68.075,22
PWM7: R13.1 T7.1 | length 3.9
  Top Layer w0.2: T7.1 77.75,18.9 77.75,22 R13.1
PWM8: R15.1 T8.1 | length 6.7
  Top Layer w0.2: R15.1 83.698,22 cw(c83.698,19.46) 85.494,21.256 86.911,19.839 cw(c85.972,18.9) T8.1
PWM9: R16.1 T9.1 | length 3.9
  Top Layer w0.2: R16.1@81.925,38 82.25,38 82.25,41.1 T9.1
PWM10: R23.1 T10.1 | length 3.9
  Top Layer w0.2: R23.1 72.25,38 72.25,41.1 T10.1
PWM11: R24.1 T11.1 | length 3.9
  Top Layer w0.2: R24.1 62.25,38 62.25,41.1 T11.1
PWM12: R25.1 T12.1 | length 3.9
  Top Layer w0.2: R25.1 52.25,38 52.25,41.1 T12.1
PWM13: R26.1 T13.1 | length 3.9
  Top Layer w0.2: R26.1 42.25,38 42.25,41.1 T13.1
PWM14: R27.1 T14.1 | length 3.9
  Top Layer w0.2: R27.1 32.25,38 32.25,41.1 T14.1
PWM15: R28.1 T15.1 | length 3.6
  Top Layer w0.2: R28.1 22.15,41.1 T15.1
PWM16: R29.1 T16.1 | length 3.9
  Top Layer w0.2: R29.1 12.25,38 12.25,41.1 T16.1
SCL: P19.3 P20.3 P23.4 P24.4 R30.1 U1.26 | length 83.4
  Top Layer w0.2: P20.3@5.247,17.787 5.356,17.896 ccw(c3.56,19.692) 6.1,19.692 6.1,20.2 ccw(c5,20.2) 5,21.3 4.5,21.3 cw(c4.5,22.05) 3.85,21.675 cw(c4.5,22.05) 3.75,22.05 3.75,37.618 cw(c6.29,37.618) 4.494,39.414 P19.3 6.099,38.821 cw(c4.529,37.25) 6.75,37.25 6.75,35.54 ccw(c9.29,35.54) 9.29,33 11.548,33 ccw(c11.548,35.54) 13.344,33.744 R30.1 17.448,34 ccw(c17.448,36.54) 19.244,34.744 19.506,35.006 cw(c21.302,33.21) 21.302,35.75 34.75,35.75 cw(c34.75,34.25) 36.25,34.25 36.25,32 ccw(c37.5,32) 37.5,30.75 45.825,30.75 ccw(c45.825,32) 47.075,32 U1.26
  Bottom Layer w0.2: P24.4 P20.3 ; P23.4 P19.3
SDA: P19.2 P20.2 P23.3 P24.3 R31.1 U1.27 | length 82.2
  Top Layer w0.2: P20.2 4.07,20.08 cw(c4.07,20.9) 3.25,20.9 3.25,39.658 cw(c5.79,39.658) 3.994,41.454 P19.2 6.506,40.954 cw(c4.71,39.158) 7.25,39.158 7.25,37.54 ccw(c9.79,37.54) 9.79,35 11.548,35 ccw(c11.548,37.54) 13.344,35.744 R31.1 cw(c13.85,36) 13.85,36.25 34.75,36.25 cw(c34.75,34.25) 36.75,34.25 36.75,32.5 ccw(c38,32.5) 38,31.25 45.587,31.25 ccw(c45.587,32.087) 46.425,32.087 U1.27
  Bottom Layer w0.2: P24.3 4.807,20.08 cw(c4.807,19.807) P20.2@5,20 ; P23.3 P19.2
VCC: C1.1 C2.1 P19.4 P20.4 P23.1 P24.1 R3.1 R5.1 R7.1 R9.1 R10.1 R12.1 R14.1 R30.2 R31.2 U1.28 | length 117.4
  Top Layer w0.4: v1(10.9,32) R9.1 ; v1(10.9,34) R30.2 ; v1(10.9,36) R31.2 ; R3.1 v1(32.35,25) ; R5.1 v1(32.35,27) ; R7.1 v1(32.35,29) ; R10.1 v1(32.35,31) ; R12.1 v1(32.35,33) ; R14.1 v1(32.35,35) ; C2.1@42.35,33.767 C1.1 ccw(c42.6,32.25) 42.6,32 45.5,32 ccw(c45.5,32.275) 45.775,32.275 U1.28 ; C2.1@42.4,33.8 v1(43.4,33.8) ; C2.1@42.4,34.7 v1(43.4,34.7)
  Top Layer w0.5: P20.4 6.256,16.256 ccw(c4.46,18.052) 7,18.052 7,22.948 ccw(c4.46,22.948) 6.256,24.744 5.744,25.256 cw(c7.54,27.052) 5,27.052 v1(5,27.75) P19.4
  Bottom Layer w0.5: P23.1@1.365,46.905 ccw(c2.898,45.372) P23.1@1.364,46.904 ; P24.1 4.3,27.46 cw(c5,26.76) v1(5,27.75) ; P23.1 P23.1@1.364,46.904 ; P19.4 4.624,37.756 ccw(c2.828,35.96) 2.828,38.5 1.5,38.5 cw(c1.5,39.27) 0.73,39.27 0.73,45.372 cw(c2.898,45.372) P23.1@1.364,46.904
  Bottom Layer w1: P19.4 10.9,37.38 ; v1(10.9,32) v1(10.9,36) 10.9,37.38 ; v1(32.35,25) v1(32.35,27) v1(32.35,29) v1(32.35,31) v1(32.35,33) v1(32.35,35) 32.35,37.38 ; v1(43.4,33.8) v1(43.4,34.7) 43.4,35.59 ccw(c41.61,35.59) 41.61,37.38 32.35,37.38 ; 10.9,37.38 32.35,37.38
VPWR1: C3.1 C4.1 P1.1 P2.1 P3.1 P4.1 P5.1 P6.1 P7.1 P8.1 P17.1 P17.2 | length 248
  Top Layer w2: P1.1 ccw(c15.75,4) 15.75,1.5 23.25,1.5 ; P2.1 23.25,1.5 ; P3.1 33.25,1.5 ; P4.1 43.25,1.5 ; P5.1 53.25,1.5 ; P6.1 63.25,1.5 ; P7.1 73.25,1.5 ; P8.1 83.25,1.5 ; C3.1 94.15,18.6 cw(c94.15,16.75) P17.2 P17.1 96,10.875 cw(c93.625,10.875) 93.625,8.5 ccw(c93.625,6.125) 91.25,6.125 91.25,3.75 cw(c89,3.75) 89,1.5 83.25,1.5 ; 23.25,1.5 33.25,1.5 ; 33.25,1.5 43.25,1.5 ; 43.25,1.5 53.25,1.5 ; 53.25,1.5 63.25,1.5 ; 63.25,1.5 73.25,1.5 ; 73.25,1.5 83.25,1.5
  Bottom Layer w2: P1.1 ccw(c15.75,4) 15.75,1.5 23.25,1.5 ; P2.1 23.25,1.5 ; P3.1 33.25,1.5 ; P4.1 43.25,1.5 ; P5.1 53.25,1.5 ; P6.1 63.25,1.5 ; P7.1 73.25,1.5 ; P8.1 83.25,1.5 ; C4.1 88.198,23.75 cw(c88.198,21.21) 89.994,23.006 91.756,21.244 ccw(c93.552,23.04) 93.552,20.5 ; 94,20.5 cw(c94,18.5) 96,18.5 P17.2 P17.1 96,10.875 cw(c93.625,10.875) 93.625,8.5 ccw(c93.625,6.125) 91.25,6.125 91.25,3.75 cw(c89,3.75) 89,1.5 83.25,1.5 ; 23.25,1.5 33.25,1.5 ; 33.25,1.5 43.25,1.5 ; 43.25,1.5 53.25,1.5 ; 53.25,1.5 63.25,1.5 ; 63.25,1.5 73.25,1.5 ; 73.25,1.5 83.25,1.5
VPWR2: C5.1 C6.1 P9.2 P10.2 P11.2 P12.2 P13.2 P14.2 P15.2 P16.2 P21.1 P21.2 | length 248.4
  Top Layer w2: P16.2 cw(c15.75,56) 15.75,58.5 23.25,58.5 ; P15.2 23.25,58.5 ; P14.2 33.25,58.5 ; P13.2 43.25,58.5 ; P12.2 53.25,58.5 ; P11.2 63.25,58.5 ; P10.2 73.25,58.5 ; P9.2 83.25,58.5 ; C5.1 94.15,41.4 ccw(c94.15,43.25) P21.1 P21.2 96,49.125 ccw(c93.625,49.125) 93.625,51.5 cw(c93.625,53.875) 91.25,53.875 91.25,56.25 ccw(c89,56.25) 89,58.5 83.25,58.5 ; 23.25,58.5 33.25,58.5 ; 33.25,58.5 43.25,58.5 ; 43.25,58.5 53.25,58.5 ; 53.25,58.5 63.25,58.5 ; 63.25,58.5 73.25,58.5 ; 73.25,58.5 83.25,58.5
  Bottom Layer w2: P16.2 cw(c15.75,56) 15.75,58.5 23.25,58.5 ; P15.2 23.25,58.5 ; P14.2 33.25,58.5 ; P13.2 43.25,58.5 ; P12.2 53.25,58.5 ; P11.2 63.25,58.5 ; P10.2 73.25,58.5 ; P9.2 83.25,58.5 ; C6.1 88.198,36.25 ccw(c88.198,38.79) 89.994,36.994 91.756,38.756 cw(c93.552,36.96) 93.552,39.5 94,39.5 ccw(c94,41.5) 96,41.5 P21.1 P21.2 96,49.125 ccw(c93.625,49.125) 93.625,51.5 cw(c93.625,53.875) 91.25,53.875 91.25,56.25 ccw(c89,56.25) 89,58.5 83.25,58.5 ; 23.25,58.5 33.25,58.5 ; 33.25,58.5 43.25,58.5 ; 43.25,58.5 53.25,58.5 ; 53.25,58.5 63.25,58.5 ; 63.25,58.5 73.25,58.5 ; 73.25,58.5 83.25,58.5

## Polygon pours and split planes (outlines as drawn)
GND on Top Layer "GND_L01_P010" (solid, remove dead copper, pour order 10): 0,60 100,60 100,0 0,0
GND on Bottom Layer "GND_L02_P006" (solid, remove dead copper, pour order 6): 0,0 0,60 100,60 100,0

## Keep-outs
Keep-Out Layer:
  circle w0.2: c3,3 r3
  circle w0.2: c97,3 r3
  circle w0.2: c97,57 r3
  circle w0.2: c3,57 r3
  text ".Layer_Name" at 298.5,-23 h3.5

## Other copper
Top Layer:
  rectangle net NetP2_2: 20.5,5.5 29.5,17
  rectangle net NetP1_2: 10.5,5.5 19.5,17
  rectangle net NetP2_2: 20.5,5.5 29.5,17
  rectangle net NetP3_2: 30.5,5.5 39.5,17
  rectangle net NetP4_2: 40.5,5.5 49.5,17
  rectangle net NetP5_2: 50.5,5.5 59.5,17
  rectangle net NetP6_2: 60.5,5.5 69.5,17
  rectangle net NetP7_2: 70.5,5.5 79.5,17
  rectangle net NetP8_2: 80.5,5.5 89.5,17
  region net NetP9_1: 89.5,54.5 80.5,54.5 80.5,43 89.5,43
  region net NetP10_1: 79.5,54.5 70.5,54.5 70.5,43 79.5,43
  region net NetP11_1: 69.5,54.5 60.5,54.5 60.5,43 69.5,43
  region net NetP12_1: 59.5,54.5 50.5,54.5 50.5,43 59.5,43
  region net NetP13_1: 49.5,54.5 40.5,54.5 40.5,43 49.5,43
  region net NetP14_1: 39.5,54.5 30.5,54.5 30.5,43 39.5,43
  region net NetP15_1: 29.5,54.5 20.5,54.5 20.5,43 29.5,43
  region net NetP16_1: 19.5,54.5 10.5,54.5 10.5,43 19.5,43
  region net GND: 87.75,42.5 89,42.5 89,39.75 87.75,39.75
  region net GND: 17.75,42.5 16.25,42.5 ccw(c16.25,41.293) 15.396,42.146 15.25,42 ccw(c15.854,41.396) 15,41.396 15,41 17.75,41
  region net GND: 16.85,39.75 18.35,39.75 ccw(c18.35,40.957) 19.204,40.104 19.35,40.25 ccw(c18.746,40.854) 19.6,40.854 19.6,41.25 16.85,41.25
  region net GND: 16.85,42.5 18.35,42.5 cw(c18.35,41.293) 19.204,42.146 19.35,42 cw(c18.746,41.396) 19.6,41.396 19.6,41 16.85,41
  region net GND: 17.75,39.75 16.25,39.75 cw(c16.25,40.957) 15.396,40.104 15.25,40.25 cw(c15.854,40.854) 15,40.854 15,41.25 17.75,41.25
  region net GND: 27.75,39.75 26.25,39.75 cw(c26.25,40.957) 25.396,40.104 25.25,40.25 cw(c25.854,40.854) 25,40.854 25,41.25 27.75,41.25
  region net GND: 26.85,42.5 28.35,42.5 cw(c28.35,41.293) 29.204,42.146 29.35,42 cw(c28.746,41.396) 29.6,41.396 29.6,41 26.85,41
  region net GND: 26.85,39.75 28.35,39.75 ccw(c28.35,40.957) 29.204,40.104 29.35,40.25 ccw(c28.746,40.854) 29.6,40.854 29.6,41.25 26.85,41.25
  region net GND: 27.75,42.5 26.25,42.5 ccw(c26.25,41.293) 25.396,42.146 25.25,42 ccw(c25.854,41.396) 25,41.396 25,41 27.75,41
  region net GND: 37.75,39.75 36.25,39.75 cw(c36.25,40.957) 35.396,40.104 35.25,40.25 cw(c35.854,40.854) 35,40.854 35,41.25 37.75,41.25
  region net GND: 36.85,42.5 38.35,42.5 cw(c38.35,41.293) 39.204,42.146 39.35,42 cw(c38.746,41.396) 39.6,41.396 39.6,41 36.85,41
  region net GND: 36.85,39.75 38.35,39.75 ccw(c38.35,40.957) 39.204,40.104 39.35,40.25 ccw(c38.746,40.854) 39.6,40.854 39.6,41.25 36.85,41.25
  region net GND: 37.75,42.5 36.25,42.5 ccw(c36.25,41.293) 35.396,42.146 35.25,42 ccw(c35.854,41.396) 35,41.396 35,41 37.75,41
  region net GND: 47.75,39.75 46.25,39.75 cw(c46.25,40.957) 45.396,40.104 45.25,40.25 cw(c45.854,40.854) 45,40.854 45,41.25 47.75,41.25
  region net GND: 46.85,42.5 48.35,42.5 cw(c48.35,41.293) 49.204,42.146 49.35,42 cw(c48.746,41.396) 49.6,41.396 49.6,41 46.85,41
  region net GND: 46.85,39.75 48.35,39.75 ccw(c48.35,40.957) 49.204,40.104 49.35,40.25 ccw(c48.746,40.854) 49.6,40.854 49.6,41.25 46.85,41.25
  region net GND: 47.75,42.5 46.25,42.5 ccw(c46.25,41.293) 45.396,42.146 45.25,42 ccw(c45.854,41.396) 45,41.396 45,41 47.75,41
  region net GND: 57.75,39.75 56.25,39.75 cw(c56.25,40.957) 55.396,40.104 55.25,40.25 cw(c55.854,40.854) 55,40.854 55,41.25 57.75,41.25
  region net GND: 56.85,42.5 58.35,42.5 cw(c58.35,41.293) 59.204,42.146 59.35,42 cw(c58.746,41.396) 59.6,41.396 59.6,41 56.85,41
  region net GND: 56.85,39.75 58.35,39.75 ccw(c58.35,40.957) 59.204,40.104 59.35,40.25 ccw(c58.746,40.854) 59.6,40.854 59.6,41.25 56.85,41.25
  region net GND: 57.75,42.5 56.25,42.5 ccw(c56.25,41.293) 55.396,42.146 55.25,42 ccw(c55.854,41.396) 55,41.396 55,41 57.75,41
  region net GND: 67.75,39.75 66.25,39.75 cw(c66.25,40.957) 65.396,40.104 65.25,40.25 cw(c65.854,40.854) 65,40.854 65,41.25 67.75,41.25
  region net GND: 66.85,42.5 68.35,42.5 cw(c68.35,41.293) 69.204,42.146 69.35,42 cw(c68.746,41.396) 69.6,41.396 69.6,41 66.85,41
  region net GND: 66.85,39.75 68.35,39.75 ccw(c68.35,40.957) 69.204,40.104 69.35,40.25 ccw(c68.746,40.854) 69.6,40.854 69.6,41.25 66.85,41.25
  region net GND: 67.75,42.5 66.25,42.5 ccw(c66.25,41.293) 65.396,42.146 65.25,42 ccw(c65.854,41.396) 65,41.396 65,41 67.75,41
  region net GND: 77.75,39.75 76.25,39.75 cw(c76.25,40.957) 75.396,40.104 75.25,40.25 cw(c75.854,40.854) 75,40.854 75,41.25 77.75,41.25
  region net GND: 76.85,42.5 78.35,42.5 cw(c78.35,41.293) 79.204,42.146 79.35,42 cw(c78.746,41.396) 79.6,41.396 79.6,41 76.85,41
  region net GND: 76.85,39.75 78.35,39.75 ccw(c78.35,40.957) 79.204,40.104 79.35,40.25 ccw(c78.746,40.854) 79.6,40.854 79.6,41.25 76.85,41.25
  region net GND: 77.75,42.5 76.25,42.5 ccw(c76.25,41.293) 75.396,42.146 75.25,42 ccw(c75.854,41.396) 75,41.396 75,41 77.75,41
  region net GND: 87.75,39.75 86.25,39.75 cw(c86.25,40.957) 85.396,40.104 85.25,40.25 cw(c85.854,40.854) 85,40.854 85,41.25 87.75,41.25
  region net GND: 87.75,42.5 86.25,42.5 ccw(c86.25,41.293) 85.396,42.146 85.25,42 ccw(c85.854,41.396) 85,41.396 85,41 87.75,41
  region net GND: 83.15,17.55 81.65,17.55 cw(c81.65,18.757) 80.796,17.904 80.65,18.05 cw(c81.254,18.654) 80.4,18.654 80.4,19.05 83.15,19.05
  region net GND: 82.25,20.3 83.75,20.3 cw(c83.75,19.093) 84.604,19.946 84.75,19.8 cw(c84.146,19.196) 85,19.196 85,18.8 82.25,18.8
  region net GND: 82.25,17.55 83.75,17.55 ccw(c83.75,18.757) 84.604,17.904 84.75,18.05 ccw(c84.146,18.654) 85,18.654 85,19.05 82.25,19.05
  region net GND: 83.15,20.3 81.65,20.3 ccw(c81.65,19.093) 80.796,19.946 80.65,19.8 ccw(c81.254,19.196) 80.4,19.196 80.4,18.8 83.15,18.8
  region net GND: 73.15,17.55 71.65,17.55 cw(c71.65,18.757) 70.796,17.904 70.65,18.05 cw(c71.254,18.654) 70.4,18.654 70.4,19.05 73.15,19.05
  region net GND: 72.25,20.3 73.75,20.3 cw(c73.75,19.093) 74.604,19.946 74.75,19.8 cw(c74.146,19.196) 75,19.196 75,18.8 72.25,18.8
  region net GND: 72.25,17.55 73.75,17.55 ccw(c73.75,18.757) 74.604,17.904 74.75,18.05 ccw(c74.146,18.654) 75,18.654 75,19.05 72.25,19.05
  region net GND: 73.15,20.3 71.65,20.3 ccw(c71.65,19.093) 70.796,19.946 70.65,19.8 ccw(c71.254,19.196) 70.4,19.196 70.4,18.8 73.15,18.8
  region net GND: 63.15,17.55 61.65,17.55 cw(c61.65,18.757) 60.796,17.904 60.65,18.05 cw(c61.254,18.654) 60.4,18.654 60.4,19.05 63.15,19.05
  region net GND: 62.25,20.3 63.75,20.3 cw(c63.75,19.093) 64.604,19.946 64.75,19.8 cw(c64.146,19.196) 65,19.196 65,18.8 62.25,18.8
  region net GND: 62.25,17.55 63.75,17.55 ccw(c63.75,18.757) 64.604,17.904 64.75,18.05 ccw(c64.146,18.654) 65,18.654 65,19.05 62.25,19.05
  region net GND: 63.15,20.3 61.65,20.3 ccw(c61.65,19.093) 60.796,19.946 60.65,19.8 ccw(c61.254,19.196) 60.4,19.196 60.4,18.8 63.15,18.8
  region net GND: 53.15,17.55 51.65,17.55 cw(c51.65,18.757) 50.796,17.904 50.65,18.05 cw(c51.254,18.654) 50.4,18.654 50.4,19.05 53.15,19.05
  region net GND: 52.25,20.3 53.75,20.3 cw(c53.75,19.093) 54.604,19.946 54.75,19.8 cw(c54.146,19.196) 55,19.196 55,18.8 52.25,18.8
  region net GND: 52.25,17.55 53.75,17.55 ccw(c53.75,18.757) 54.604,17.904 54.75,18.05 ccw(c54.146,18.654) 55,18.654 55,19.05 52.25,19.05
  region net GND: 53.15,20.3 51.65,20.3 ccw(c51.65,19.093) 50.796,19.946 50.65,19.8 ccw(c51.254,19.196) 50.4,19.196 50.4,18.8 53.15,18.8
  region net GND: 43.15,17.55 41.65,17.55 cw(c41.65,18.757) 40.796,17.904 40.65,18.05 cw(c41.254,18.654) 40.4,18.654 40.4,19.05 43.15,19.05
  region net GND: 42.25,20.3 43.75,20.3 cw(c43.75,19.093) 44.604,19.946 44.75,19.8 cw(c44.146,19.196) 45,19.196 45,18.8 42.25,18.8
  region net GND: 42.25,17.55 43.75,17.55 ccw(c43.75,18.757) 44.604,17.904 44.75,18.05 ccw(c44.146,18.654) 45,18.654 45,19.05 42.25,19.05
  region net GND: 43.15,20.3 41.65,20.3 ccw(c41.65,19.093) 40.796,19.946 40.65,19.8 ccw(c41.254,19.196) 40.4,19.196 40.4,18.8 43.15,18.8
  region net GND: 33.15,17.55 31.65,17.55 cw(c31.65,18.757) 30.796,17.904 30.65,18.05 cw(c31.254,18.654) 30.4,18.654 30.4,19.05 33.15,19.05
  region net GND: 32.25,20.3 33.75,20.3 cw(c33.75,19.093) 34.604,19.946 34.75,19.8 cw(c34.146,19.196) 35,19.196 35,18.8 32.25,18.8
  region net GND: 32.25,17.55 33.75,17.55 ccw(c33.75,18.757) 34.604,17.904 34.75,18.05 ccw(c34.146,18.654) 35,18.654 35,19.05 32.25,19.05
  region net GND: 33.15,20.3 31.65,20.3 ccw(c31.65,19.093) 30.796,19.946 30.65,19.8 ccw(c31.254,19.196) 30.4,19.196 30.4,18.8 33.15,18.8
  region net GND: 23.15,17.55 21.65,17.55 cw(c21.65,18.757) 20.796,17.904 20.65,18.05 cw(c21.254,18.654) 20.4,18.654 20.4,19.05 23.15,19.05
  region net GND: 22.25,20.3 23.75,20.3 cw(c23.75,19.093) 24.604,19.946 24.75,19.8 cw(c24.146,19.196) 25,19.196 25,18.8 22.25,18.8
  region net GND: 22.25,17.55 23.75,17.55 ccw(c23.75,18.757) 24.604,17.904 24.75,18.05 ccw(c24.146,18.654) 25,18.654 25,19.05 22.25,19.05
  region net GND: 23.15,20.3 21.65,20.3 ccw(c21.65,19.093) 20.796,19.946 20.65,19.8 ccw(c21.254,19.196) 20.4,19.196 20.4,18.8 23.15,18.8
  region net GND: 13.15,20.3 11.65,20.3 ccw(c11.65,19.093) 10.796,19.946 10.65,19.8 ccw(c11.254,19.196) 10.4,19.196 10.4,18.8 13.15,18.8
  region net GND: 12.25,17.55 13.75,17.55 ccw(c13.75,18.757) 14.604,17.904 14.75,18.05 ccw(c14.146,18.654) 15,18.654 15,19.05 12.25,19.05
  region net GND: 12.25,20.3 13.75,20.3 cw(c13.75,19.093) 14.604,19.946 14.75,19.8 cw(c14.146,19.196) 15,19.196 15,18.8 12.25,18.8
  region net GND: 13.15,17.55 11.65,17.55 cw(c11.65,18.757) 10.796,17.904 10.65,18.05 cw(c11.254,18.654) 10.4,18.654 10.4,19.05 13.15,19.05
  text ".Layer_Name" at 298.5,-23 h3.5
Bottom Layer:
  rectangle net NetP1_2: 10.5,5.5 19.5,17
  rectangle net NetP2_2: 20.5,5.5 29.5,17
  rectangle net NetP3_2: 30.5,5.5 39.5,17
  rectangle net NetP4_2: 40.5,5.5 49.5,17
  rectangle net NetP5_2: 50.5,5.5 59.5,17
  rectangle net NetP6_2: 60.5,5.5 69.5,17
  rectangle net NetP7_2: 70.5,5.5 79.5,17
  rectangle net NetP8_2: 80.5,5.5 89.5,17
  region net NetP9_1: 89.5,54.5 80.5,54.5 80.5,43 89.5,43
  region net NetP10_1: 79.5,54.5 70.5,54.5 70.5,43 79.5,43
  region net NetP11_1: 69.5,54.5 60.5,54.5 60.5,43 69.5,43
  region net NetP12_1: 59.5,54.5 50.5,54.5 50.5,43 59.5,43
  region net NetP13_1: 49.5,54.5 40.5,54.5 40.5,43 49.5,43
  region net NetP14_1: 39.5,54.5 30.5,54.5 30.5,43 39.5,43
  region net NetP15_1: 29.5,54.5 20.5,54.5 20.5,43 29.5,43
  region net NetP16_1: 19.5,54.5 10.5,54.5 10.5,43 19.5,43
  text ".Layer_Name" at 298.5,-23 h3.5

## Silkscreen, mask and mechanical layers (free items; w line width, h text height)
Top Overlay:
  drawing of 139 lines, arcs and shapes, not listed
  text "VCC" at 3.27,46.54 h2
  text "VCC" at 92.5,44.05 h2 r90
  text "GND" at 6.27,44 h2
  text "SDA" at 6.27,41.46 h2
  text "SCL" at 6.27,38.92 h2
  text "VCC" at 6.27,36.38 h2
  text "A5" at 19.5,34.25 h2
  text "A4" at 19.5,32.25 h2
  text "GND" at 92.5,30.95 h2 r90
  text "A3" at 19.5,30.25 h2
  text "A2" at 19.5,28.25 h2
  text "A1" at 19.5,26.25 h2
  text "00_S#:________" at 57.4,24.5 h1.52
  text "A0" at 19.5,24.25 h2
  text "VCC" at 3.27,24.16 h2
  text "GND" at 92.5,24.05 h2 r90
  text "GND" at 6.27,21.62 h2
  text "SDA" at 6.27,19.08 h2
  text "SCL" at 6.27,16.54 h2
  text "VCC" at 6.27,14 h2
  text "VCC" at 92.5,10.95 h2 r90
  text "WIM" at 4,8.25 h2 r15
  text ".Layer_Name" at 298.5,-23 h3.5
Bottom Overlay:
  drawing of 262 lines, arcs and shapes, not listed
  text "VCC" at 14.75,54.75 h2 r90
  text "LED15" at 18.25,54.75 h2 r90
  text "VCC" at 24.75,54.75 h2 r90
  text "LED14" at 28.25,54.75 h2 r90
  text "VCC" at 34.75,54.75 h2 r90
  text "LED13" at 38.25,54.75 h2 r90
  text "VCC" at 44.75,54.75 h2 r90
  text "LED12" at 48.25,54.75 h2 r90
  text "VCC" at 54.75,54.75 h2 r90
  text "LED11" at 58.25,54.75 h2 r90
  text "VCC" at 64.75,54.75 h2 r90
  text "LED10" at 68.25,54.75 h2 r90
  text "VCC" at 74.75,54.75 h2 r90
  text "LED9" at 78.25,54.75 h2 r90
  text "VCC" at 84.75,54.75 h2 r90
  text "LED8" at 88.25,54.75 h2 r90
  text "VCC" at 94.75,49 h2.5 r90
  text "VCC" at 7.27,46.54 h2
  text "GND" at 10.27,44 h2
  text "SDA" at 10.27,41.46 h2
  text "SCL" at 10.27,38.92 h2
  text "GND" at 94.75,37.25 h2.5 r90
  text "VCC" at 10.27,36.38 h2
  text "GND" at 94.75,29.25 h2.5 r90
  text "VCC" at 7.27,24.16 h2
  text "GND" at 10.27,21.62 h2
  text "SDA" at 10.27,19.08 h2
  text "VCC" at 94.75,17.5 h2.5 r90
  text "SCL" at 10.27,16.54 h2
  text "VCC" at 10.27,14 h2
  text "VCC" at 14.75,11.25 h2 r90
  text "LED0" at 18.25,11.25 h2 r90
  text "VCC" at 24.75,11.25 h2 r90
  text "LED1" at 28.25,11.25 h2 r90
  text "VCC" at 34.75,11.25 h2 r90
  text "LED2" at 38.25,11.25 h2 r90
  text "VCC" at 44.75,11.25 h2 r90
  text "LED3" at 48.25,11.25 h2 r90
  text "VCC" at 54.75,11.25 h2 r90
  text "LED4" at 58.25,11.25 h2 r90
  text "VCC" at 64.75,11.25 h2 r90
  text "LED5" at 68.25,11.25 h2 r90
  text "VCC" at 74.75,11.25 h2 r90
  text "LED6" at 78.25,11.25 h2 r90
  text "VCC" at 84.75,11.25 h2 r90
  text "LED7" at 88.25,11.25 h2 r90
  text ".Layer_Name" at 298.5,-23 h3.5
Top Paste:
  text ".Layer_Name" at 298.5,-23 h3.5
Bottom Paste:
  text ".Layer_Name" at 298.5,-23 h3.5
Top Solder:
  text ".Layer_Name" at 298.5,-23 h3.5
Bottom Solder:
  drawing of 20 lines, arcs and shapes, not listed
  text ".Layer_Name" at 298.5,-23 h3.5
Drill Guide:
  text ".Layer_Name" at 298.5,-23 h3.5
3D Symbols:
  text ".Layer_Name" at 298.5,-23 h3.5
Outline:
  the board outline again, w0.2
Comments:
  text ".Layer_Name" at 298.5,-23 h3.5
Fabrication:
  text "All Dimensions are in mm" at 5,-16 h1
  text ".Layer_Name" at 298.5,-23 h3.5
Placebound Top:
  text ".Layer_Name" at 298.5,-23 h3.5
Placebound Bottom:
  text ".Layer_Name" at 298.5,-23 h3.5
Frame:
  drawing of 15 lines, arcs and shapes, not listed
  text "Document" at 294,-8 h2
  text ".PCB_TITLE" at 295.5,-13.5 h4
  text "Layer Name" at 294,-18 h2
  text "Date" at 294,-28 h2
  text "Rev" at 334,-28 h2
  text ".Print_Date" at 297,-33.5 h3.5
  text ".PCB_REV" at 338.5,-33.5 h4
  text "Desginer" at 244,-38 h2
  text "Document" at 294,-38 h2
  text ".Pcb_File_Name_No_Path" at 295.5,-43 h1.5
  text ".PCB_ENGINEER" at 248.5,-43.5 h4
Assembly Top:
  text ".Layer_Name" at 298.5,-23 h3.5
Assembly Bottom:
  text ".Layer_Name" at 298.5,-23 h3.5
Drill Drawing:
  text ".legend" at 127.25,52.25 h1

## Dimensions
0,3 to 3,3 on Drill Drawing
3,0 to 3,3 on Drill Drawing
3,3 to -3.5,-2.5 on Fabrication
0,57 to 100,57 on Fabrication
97,60 to 97,0 on Fabrication

## Text inside footprints (layer, text, board x,y; h text height)
C4: Assembly Top "+" at 83.4,21.6 h1.5 r90; Top Overlay "+" at 89.4,20.9 h1.5 r90
C6: Assembly Top "+" at 88.6,38.4 h1.5 r270; Top Overlay "+" at 87.75,39 h1.5 r270
P1: Comments "IN" at 14.42,1.5 h0.8
P2: Comments "IN" at 24.42,1.5 h0.8
P3: Comments "IN" at 34.42,1.5 h0.8
P4: Comments "IN" at 44.42,1.5 h0.8
P5: Comments "IN" at 54.42,1.5 h0.8
P6: Comments "IN" at 64.42,1.5 h0.8
P7: Comments "IN" at 74.42,1.5 h0.8
P8: Comments "IN" at 84.42,1.5 h0.8
P9: Comments "IN" at 85.58,58.5 h0.8 r180
P10: Comments "IN" at 75.58,58.5 h0.8 r180
P11: Comments "IN" at 65.58,58.5 h0.8 r180
P12: Comments "IN" at 55.58,58.5 h0.8 r180
P13: Comments "IN" at 45.58,58.5 h0.8 r180
P14: Comments "IN" at 35.58,58.5 h0.8 r180
P15: Comments "IN" at 25.58,58.5 h0.8 r180
P16: Comments "IN" at 15.58,58.5 h0.8 r180
P17: Comments "IN" at 98.5,14.42 h0.8 r90
P18: Comments "IN" at 98.5,24.42 h0.8 r90
P21: Comments "IN" at 98.5,44.42 h0.8 r90
P22: Comments "IN" at 98.5,34.42 h0.8 r90